# Altium PCB nom.pcbdoc
Units mm, origin at the board's own origin, x right, y up, seen from the top; angles counter-clockwise.
Board outline 123.47 x 110.09 mm, 2 copper layers (Top Layer, Bottom Layer); 65 components, 89 nets, 222 pads, 59 vias.
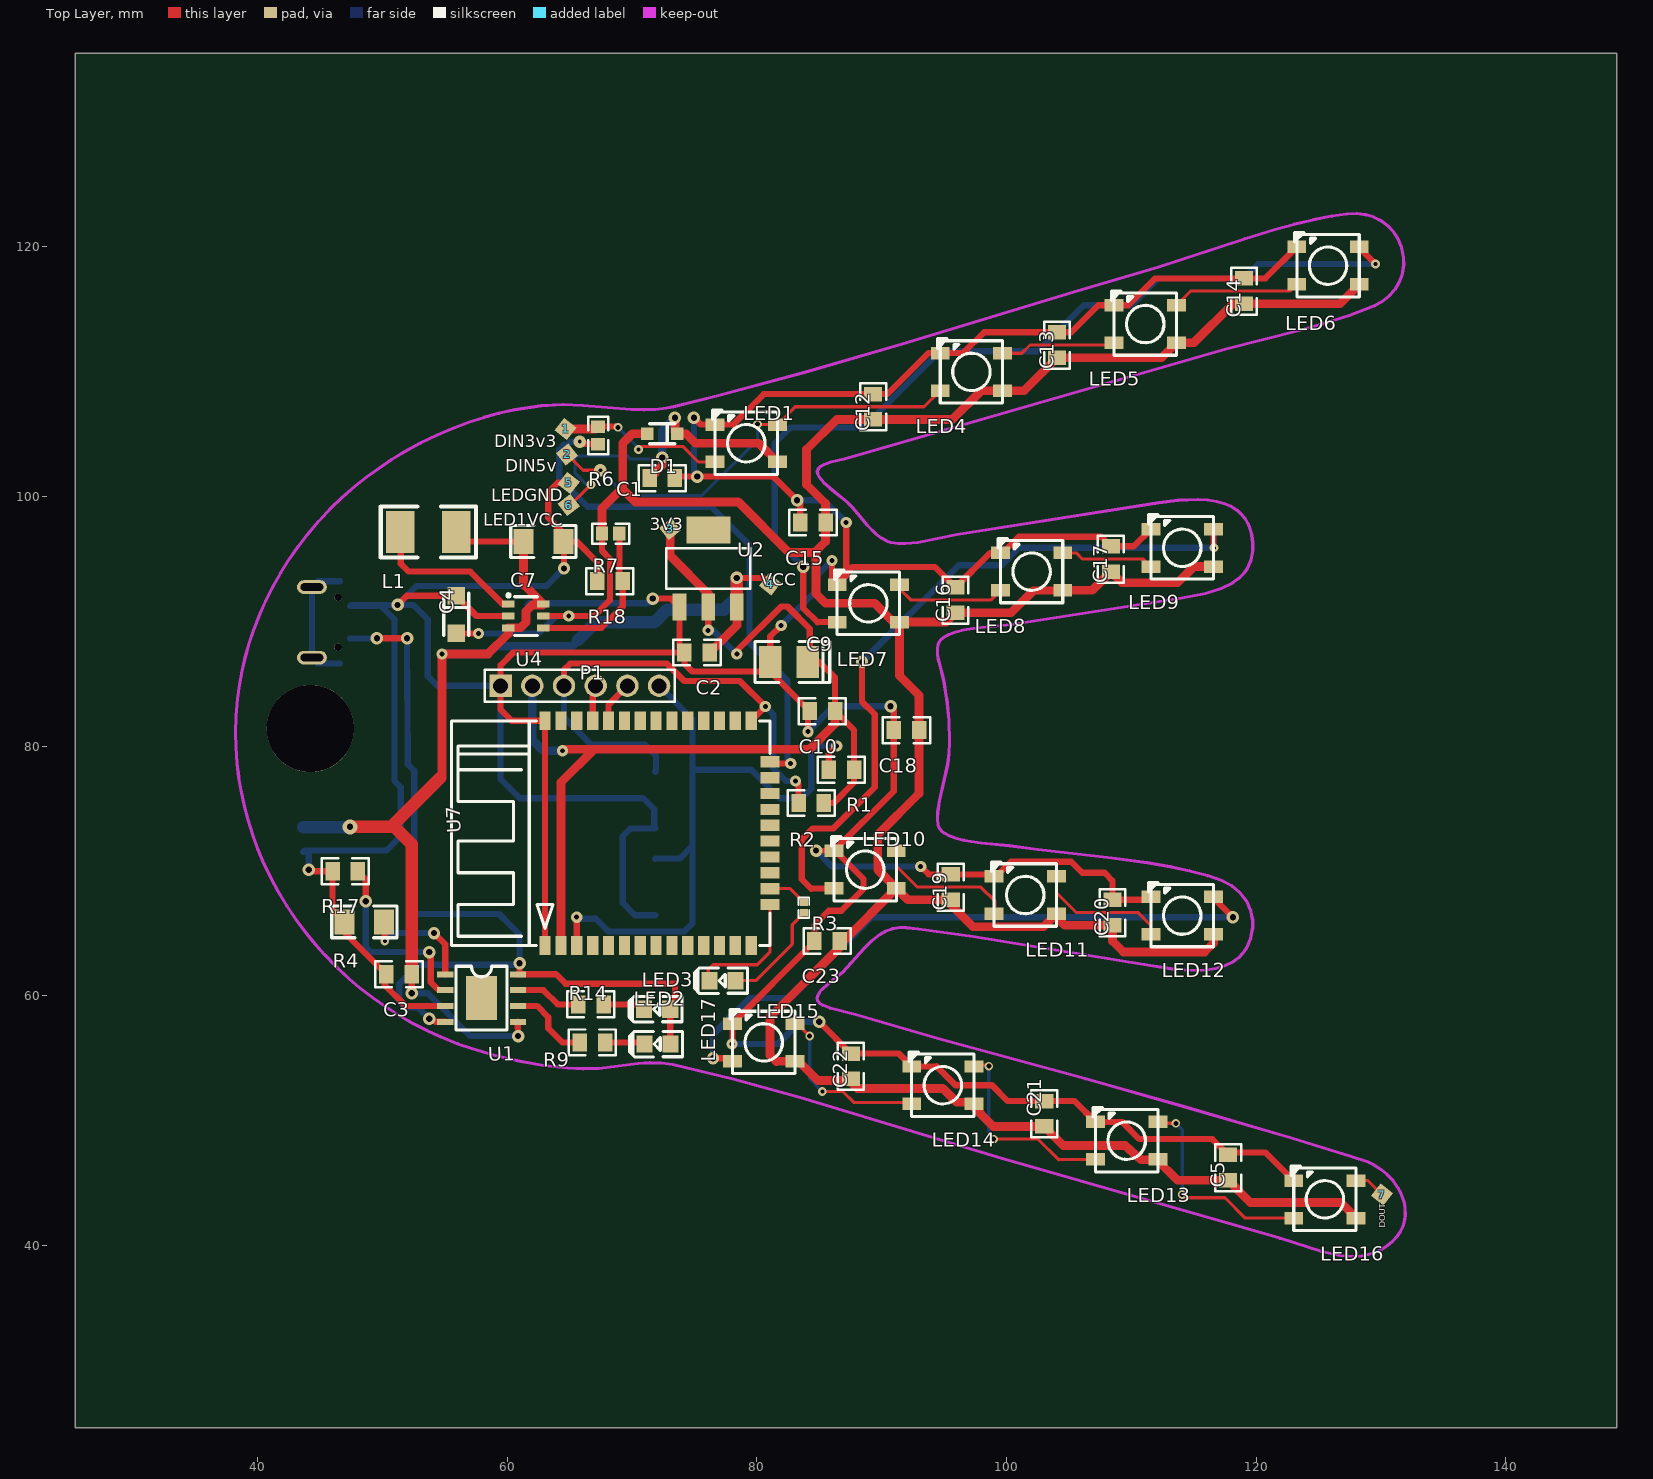
[diagram p0: Top Layer view]
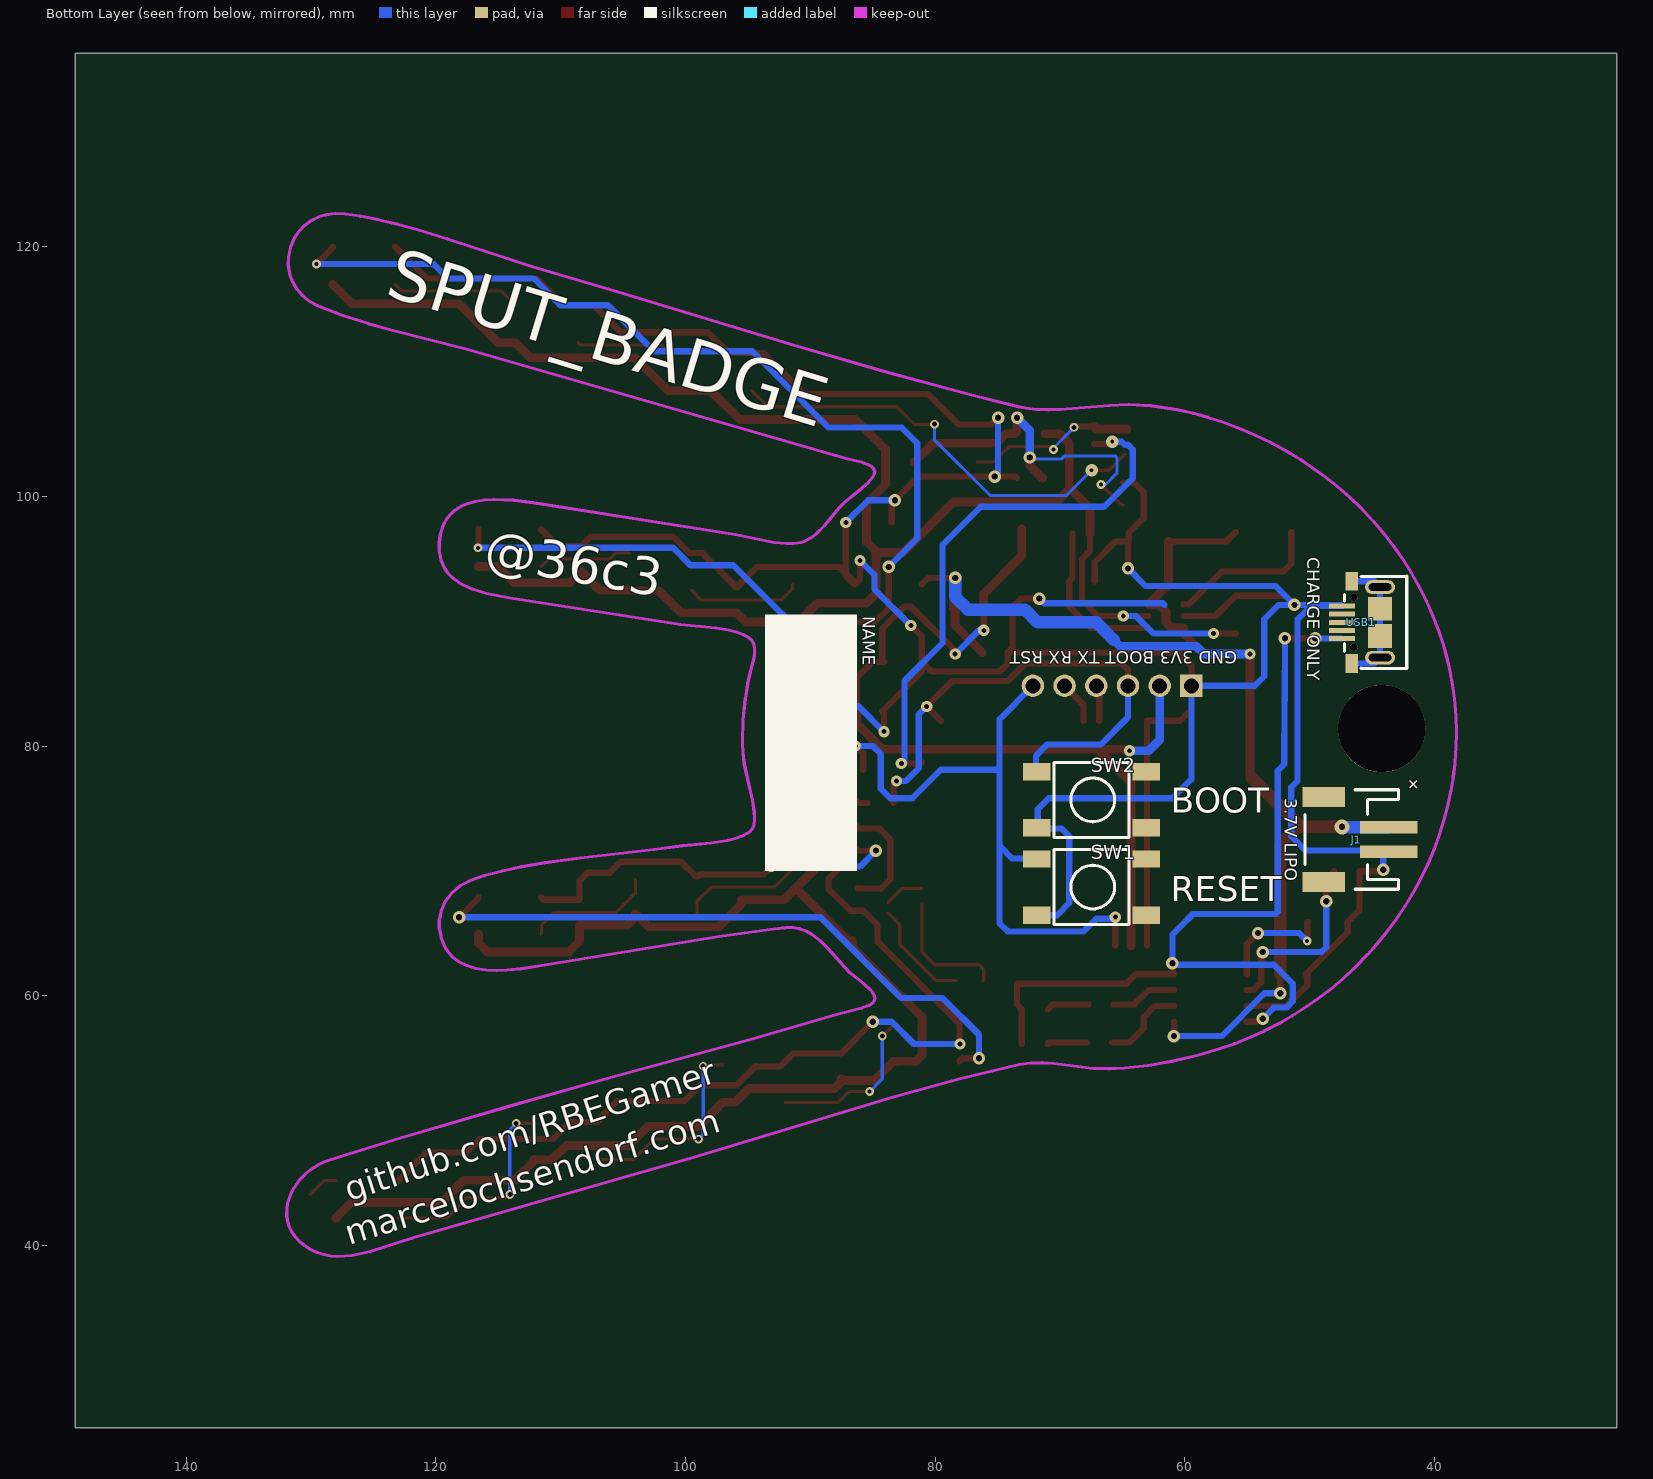
[diagram p1: Bottom Layer view, seen from below]

## Layer stack, top to bottom
Top Layer: signal copper (thickness not stored)
Dielectric: dielectric 0.32, FR-4, Dk 4.8
Bottom Layer: signal copper (thickness not stored)

## Board outline
148.868,25.4 25.4,25.4 25.4,135.486 148.868,135.486

## Components (designator, comment, footprint, x,y, rotation, side; value= is the part's Value field where it differs from the comment)
1 "TESTPAD" TESTPAD#1 64.667,105.401 r0 top
2 "TESTPAD" TESTPAD#2 64.794,103.369 r0 top
3 "TESTPAD" TESTPAD#2 73.049,97.4 r0 top
4 "TESTPAD" TESTPAD#3 81.05,92.955 r0 top
5 "TESTPAD" TESTPAD#3 64.921,101.083 r0 top
6 "TESTPAD" TESTPAD#4 64.921,99.305 r0 top
7 "TESTPAD" TESTPAD#3 130.072,44.06 r0 top
C1 "100nF" 0805 72.414,101.464 r0 top
C2 "100nF" 0805 75.208,87.494 r0 top
C3 "10uF" 0805 51.332,61.713 r0 top
C4 "10uF" CAP-SMD_L3.2-W1.6-R-RD 55.904,90.542 r90 top
C5 "100nF" 0805 117.753,46.219 r90 top
C7 "4.7uF" 1206 62.889,96.384 r180 top
C9 "100uF" CAP-SMD_L3.5-W2.8 82.574,86.732 r180 top
C10 "100nF" 0805 85.241,82.795 r0 top
C12 "100nF" 0805 89.305,107.179 r90 top
C13 "100nF" 0805 104.037,112.132 r90 top
C14 "100nF" 0805 119.023,116.45 r90 top
C15 "100nF" 0805 84.479,97.908 r180 top
C16 "100nF" 0805 95.909,91.685 r90 top
C17 "100nF" 0805 108.355,94.987 r90 top
C18 "100nF" 0805 91.972,81.271 r180 top
C19 "100nF" 0805 95.528,68.698 r90 top
C20 "100nF" 0805 108.482,66.666 r90 top
C21 "100nF" 0805 103.021,50.537 r90 top
C22 "100nF" 0805 87.527,54.347 r90 top
C23 "100nF" 0805 85.622,64.38 r180 top
D1 "1N4148WS T4" SOD-323_L1.8-W1.3-LS2.5-FD 72.414,105.02 r0 top
J1 "JST_2MM_MALE" JST-2-SMD 46.252,72.508 r270 bottom
L1 "4.7uH" 1812 53.669,97.146 r180 top
LED1 "WS2812B-B" LED-5050_4P 79.145,104.258 r0 top
LED2 "whiteLEDSMD" LED-0805 71.999,58.919 r0 top
LED3 "whiteLEDSMD" LED-0805 77.24,61.205 r0 top
LED4 "WS2812B-B" LED-5050_4P 97.179,109.973 r0 top
LED5 "WS2812B-B" LED-5050_4P 111.109,113.807 r0 top
LED6 "WS2812B-B" LED-5050_4P 125.754,118.482 r0 top
LED7 "WS2812B-B" LED-5050_4P 88.924,91.431 r0 top
LED8 "WS2812B-B" LED-5050_4P 102.005,93.971 r0 top
LED9 "WS2812B-B" LED-5050_4P 114.07,95.876 r0 top
LED10 "WS2812B-B" LED-5050_4P 88.67,70.095 r0 top
LED11 "WS2812B-B" LED-5050_4P 101.497,68.063 r0 top
LED12 "WS2812B-B" LED-5050_4P 114.07,66.412 r0 top
LED13 "WS2812B-B" LED-5050_4P 109.625,48.378 r0 top
LED14 "WS2812B-B" LED-5050_4P 94.893,52.823 r0 top
LED15 "WS2812B-B" LED-5050_4P 80.542,56.252 r0 top
LED16 "WS2812B-B" LED-5050_4P 125.5,43.679 r0 top
LED17 "whiteLEDSMD" LED-0805 72.033,56.125 r0 top
P1 "Header-Female-2.54_1x6" HDR-TH_6P-P2.54-V 65.81,84.827 r0 top
R1 "10K" 0805 86.765,78.096 r0 top
R2 "10K" 0805 84.352,75.429 r0 top
R3 "220" 0402 83.76,67.047 r90 top
R4 "0" 1206 48.538,65.904 r0 top
R6 "330" 0603 67.269,104.893 r270 top
R7 "750K" 0603 68.285,97.019 r180 top
R9 "1K" 0805 66.826,56.252 r0 top
R14 "1K" 0805 66.699,59.3 r0 top
R17 "1.2K" 0805 47.014,69.968 r0 top
R18 "220K" 0805 68.223,93.209 r0 top
SW1 "SMD Tactile Switch6*6*6mm" SW-SMD_4PIN-L6.00-W6.00 67.461,68.698 r0 bottom
SW2 "SMD Tactile Switch6*6*6mm" SW-SMD_4PIN-L6.00-W6.00 67.461,75.683 r0 bottom
U1 "TP4056" ESOP-8_L4.9-W3.9-P1.27-LS6.0-BL-EP 57.936,59.808 r270 top
U2 "AMS1117-3.3" SOT-223_L6.5-W3.5-P2.30-LS7.0-BR 76.097,94.225 r270 top
U4 "MCP1640T-I/CHY" SOT-23-6_L2.9-W1.6-P0.95-LS2.8-BL 61.492,90.415 r270 top
U7 "ESP-32S" WIFIM-SMD_ESP-32S 72.033,73.016 r90 top
USB1 "MICRO5.9MMUSB" MICRO-USB-SMD_5PIN-H-FEMALE-PITCH0.65-L_MICRO5.9MMUSB 45.871,89.907 r270 bottom

## Footprints (in the part's own frame and the unit in brackets; to place one, negate y for a bottom-side part, rotate by r counter-clockwise, add the part's x,y. Pads: shape width x height; smd on the part's side, far side on the other; paste and mask are expansions set on the pad)
0402 [mm]
  rect 0.6x0.65 smd: 1(-0.424,0) 2(0.424,0)
  silkscreen extent -0.82,-0.43 0.81,0.43
0603 [mm]
  rect 1x1.1 smd: 1(-0.7,0) 2(0.7,0)
  silkscreen extent -1.5,-0.8 1.5,0.8
0805 [mm]
  rect 1.16x1.45 smd: 1(-1.016,0) 2(1.016,0)
  silkscreen extent -1.9,-1.03 1.87,1.04
1206 [mm]
  rect 1.6x2 smd: 1(-1.6,0) 2(1.6,0)
  silkscreen extent -2.61,-1.27 2.62,1.27
1812 [mil]
  rect 90x133.86 smd: 1(-88,0) 2(88,0)
  silkscreen extent -150,-80 150,80
CAP-SMD_L3.2-W1.6-R-RD [mm]
  rect 1.4x1.4 smd: 1(1.5,0) 2(-1.5,0)
  silkscreen extent -1.7,-1 1.7,1
CAP-SMD_L3.5-W2.8 [mm]
  rect 1.8x2.6 smd: 1(-1.501,0) 2(1.501,0)
  silkscreen extent -3.26,-1.65 2.73,1.65
ESOP-8_L4.9-W3.9-P1.27-LS6.0-BL-EP [mm]
  rect 0.48x1.3 smd: 1(-1.905,-2.908) 2(-0.635,-2.908) 3(0.635,-2.908) 4(1.905,-2.908) 5(1.905,2.908) 6(0.635,2.908) 7(-0.635,2.908) 8(-1.905,2.908)
  rect 3.5x2.5 smd: 9(0,0)
  silkscreen extent -2.55,-2.05 2.55,2.05
HDR-TH_6P-P2.54-V [mm]
  rect 1.8x1.8 hole 1.2: 1(-6.35,0)
  round 1.8 hole 1.2: 2(-3.81,0) 3(-1.27,0) 4(1.27,0) 5(3.81,0) 6(6.35,0)
  silkscreen extent -7.62,-1.27 7.62,1.27
JST-2-SMD [mil]
  rect 39.4x181.1 smd: 1(39,102.5) 2(-39,102.5)
  rect 63x133.9 smd: NC1(134,-102.5) NC2(-134,-102.5)
  silkscreen extent -157,-162 157,134
LED-0805 [mm]
  rect 1.3x1.4 smd: 1(1.05,0) 2(-1.05,0)
  silkscreen extent -2.22,-1.04 1.99,1.01
LED-5050_4P [mm]
  rect 1.5x1 smd: 1(2.5,-1.5) 2(2.5,1.5) 3(-2.5,1.5) 4(-2.5,-1.5)
  silkscreen extent -2.7,-2.5 2.5,2.65
MICRO-USB-SMD_5PIN-H-FEMALE-PITCH0.65-L_MICRO5.9MMUSB [mm]
  rect 0.4x2.1 smd: 1(1.3,-1.525) 2(0.65,-1.525) 3(0,-1.525) 4(-0.65,-1.525) 5(-1.3,-1.525)
  rect 1.5x1 smd: 6(-3.3,-0.725) 6(3.3,-0.725)
  oval 1.1x2.4 hole 0.6 slot 1.8 at 90 deg: 6(-2.825,1.525) 6(2.825,1.525)
  rect 1.9x1.9 smd: 6(-1.1,1.525) 6(1.1,1.525)
  round 0.6 hole 0.6 unplated: ""(-2,-0.575) ""(2,-0.575)
  silkscreen extent -3.7,-1.32 3.7,3.67
SOD-323_L1.8-W1.3-LS2.5-FD [mm]
  rect 1x1 smd: 1(-1.2,0) 2(1.2,0)
  silkscreen extent -1,-0.8 1,0.8
SOT-23-6_L2.9-W1.6-P0.95-LS2.8-BL [mm]
  rect 0.55x1 smd: 1(-0.95,-1.4) 2(0,-1.4) 3(0.95,-1.4) 4(0.95,1.4) 5(0,1.4) 6(-0.95,1.4)
  silkscreen extent -1.78,-1.52 1.55,0.9
SOT-223_L6.5-W3.5-P2.30-LS7.0-BR [mil]
  rect 85x43 smd: 1(122,-90.5) 2(122,0.5) 3(122,90.5)
  rect 85x138 smd: 4(-122,0.5)
  silkscreen extent -64,-132 64,132
SW-SMD_4PIN-L6.00-W6.00 [mm]
  rect 2.2x1.4 smd: 1(4.4,-2.25) 2(-4.4,-2.25) 3(4.4,2.25) 4(-4.4,2.25)
  silkscreen extent -3,-3 3,3
TESTPAD#1 [mm]
  rect 1.268x1.268 smd rot 141.99: TP(0,0)
TESTPAD#2 [mm]
  rect 1.268x1.268 smd rot 38.01: TP(0,0)
TESTPAD#3 [mm]
  rect 1.268x1.268 smd rot 51.99: TP(0,0)
TESTPAD#4 [mm]
  rect 1.268x1.268 smd rot 128.01: TP(0,0)
WIFIM-SMD_ESP-32S [mm]
  rect 1.5x0.9 smd: 1(-9,9.005) 2(-9,7.735) 3(-9,6.465) 4(-9,5.195) 5(-9,3.925) 6(-9,2.655) 7(-9,1.385) 8(-9,0.115) 9(-9,-1.155) 10(-9,-2.425) 11(-9,-3.695) 12(-9,-4.965) 13(-9,-6.235) 14(-9,-7.505) 25(9,-7.505) 26(9,-6.235) 27(9,-4.965) 28(9,-3.695) 29(9,-2.425) 30(9,-1.155) 31(9,0.115) 32(9,1.385) 33(9,2.655) 34(9,3.925) 35(9,5.195) 36(9,6.465) 37(9,7.735) 38(9,9.005)
  rect 0.9x1.5 smd: 15(-5.715,-9.005) 16(-4.445,-9.005) 17(-3.175,-9.005) 18(-1.905,-9.005) 19(-0.635,-9.005) 20(0.635,-9.005) 21(1.905,-9.005) 22(3.175,-9.005) 23(4.445,-9.005) 24(5.715,-9.005)
  silkscreen extent -9,-9 9,16.5

## Free pads (board coordinates)
  round 7 hole 7 unplated: ""(44.22,81.398)

## Via types
v1: diameter 1, hole 0.5, Top Layer to Bottom Layer, 26 vias
v2: diameter 0.9, hole 0.4, Top Layer to Bottom Layer, 17 vias
v3: diameter 0.7, hole 0.4, Top Layer to Bottom Layer, 7 vias
v4: diameter 0.7, hole 0.305, Top Layer to Bottom Layer, 5 vias
v5: diameter 1, hole 0.305, Top Layer to Bottom Layer, 2 vias
v6: diameter 0.71, hole 0.305, Top Layer to Bottom Layer, 1 vias
v7: diameter 1.2, hole 0.5, Top Layer to Bottom Layer, 1 vias

## Nets (pads, with @x,y where several pads share a name; then routed paths per layer and width w, separated by ;. In a path a pad name is that pad's centre, name@x,y a point inside that pad or via, vN(x,y) a via of type N, cw(c..) or ccw(c..) an arc to the next point about the centre after c; other vN are vias at no path point)
+5V: C4.2 C5.1 C12.1 C13.1 C14.1 C15.1 C16.1 C17.1 C18.1 C19.1 C20.1 C21.1 C22.1 C23.1 D1.1 LED4.1 LED5.1 LED6.1 LED7.1 LED8.1 LED9.1 LED10.1 LED11.1 LED12.1 LED13.1 LED14.1 LED15.1 LED16.1 R7.2 U4.5 | length 273.1
  Top Layer w0.5: C4.2@55.904,89.041 v2(57.682,89.018) ; U4.5 66.953,90.415 68.223,91.685 68.223,94.987 67.588,95.622 R7.2@67.586,97.019 ; U4.5 v2(64.921,90.415)
  Top Layer w0.7: R7.2@67.586,97.019 67.588,99.051 69.112,100.575 69.239,100.575 ; D1.1 70.001,105.02 69.239,104.258 69.239,100.575 ; LED15.1@83.018,54.728 83.336,54.728 84.86,53.204 C22.1@87.4,53.204 ; LED15.1@83.042,54.751 81.558,54.728 81.05,55.236 81.05,58.284 86.638,63.872 C23.1 86.955,64.38 LED10.1 ; 84.733,95.495 84.733,92.193 85.495,91.431 89.432,91.431 90.932,89.931 LED7.1 ; C22.1 C22.1@87.4,53.204 ; LED11.1@103.997,66.309 104.657,65.65 C20.1 108.482,64.38 109.371,63.491 115.848,63.491 116.57,64.213 LED12.1 ; LED11.1 102.957,65.523 97.306,65.523 95.528,67.301 C19.1 92.084,67.682 LED10.1 ; LED8.1@104.505,92.47 102.132,92.447 100.354,90.669 C16.1 95.171,89.931 LED7.1 ; LED8.1 106.855,92.471 C17.1 109.244,93.082 113.689,93.082 114.985,94.375 LED9.1@116.57,94.375 ; LED13.1@112.014,46.878 113.689,45.203 C5.1 119.531,43.425 126.77,43.425 LED16.1@128,42.178 ; LED13.1@112.125,46.877 110.768,46.854 109.498,47.997 104.545,47.997 C21.1 98.941,49.521 97.012,51.45 96.012,51.45 94.893,52.569 88.035,52.569 C22.1@87.4,53.204 ; LED5.1 112.418,111.116 C13.1 101.394,108.473 LED4.1 97.965,108.473 95.655,106.163 C12.1 86.384,106.163 83.971,103.75 83.971,100.956 85.495,99.432 C15.1 85.495,96.384 84.606,95.495 82.574,95.495 78.51,99.559 70.255,99.559 69.239,100.575 ; LED5.1@113.611,112.307 115.008,112.307 118.134,115.434 C14.1 126.706,115.434 LED6.1 ; LED10.1 89.686,70.079 89.686,72.889 92.988,76.191 C18.1 92.988,84.065 91.424,85.629 LED7.1
  Bottom Layer w0.5: v2(57.682,89.018) 62.508,89.018 63.905,90.415 v2(64.921,90.415)
C10_2: 3.TP C9.1 C10.2 P1.2 R1.2 R2.2 U2.2 U7.2 | length 86
  Top Layer w0.5: v2(76.097,89.272) 76.097,91.113 U2.2 ; v2(78.383,87.367) 78.383,87.621 81.939,91.177 82.447,91.177 84.225,89.399 84.225,86.882 C9.1 84.987,86.732 86.257,85.462 C10.2 87.781,81.271 R1.2 87.781,77.08 86.13,75.429 R2.2
  Top Layer w0.7: U7.2@64.299,64.017 64.299,77.093 66.953,79.747 ; v2(64.413,79.62) 64.54,79.747 66.953,79.747 ; 3.TP 73.049,95.241 76.11,92.18 U2.2 ; C10.2 86.257,81.779 84.225,79.747 66.953,79.747
  Bottom Layer w0.5: v2(76.097,89.272) 76.478,89.272 v2(78.383,87.367)
  Bottom Layer w0.7: P1.2 62,80.509 62.889,79.62 v2(64.413,79.62)
GND: 5.TP C1.2 C2.1 C3.1 C4.1 C5.2 C7.1 C9.2 C10.1 C12.2 C13.2 C14.2 C15.2 C16.2 C17.2 C18.2 C19.2 C20.2 C21.2 C22.2 C23.2 J1.1 LED1.3 LED4.3 LED5.3 LED6.3 LED7.3 LED8.3 LED9.3 LED10.3 LED11.3 LED12.3 LED13.3 LED14.3 LED15.3 LED16.3 P1.1 R4.1 R17.1 R18.1 SW1.3 SW2.3 U1.3 U2.1 U4.2 U7.1 U7.38 USB1.5 | length 460.3
  Top Layer w0.5: v1(44.093,70.095) 44.22,69.968 R17.1 45.998,66.844 R4.1 46.938,65.091 C3.1 50.189,61.586 50.189,60.824 51.84,59.173 U1.3 ; v1(51.205,91.304) 51.943,92.042 C4.1 57.531,90.415 U4.2 ; U7.1 U7.38 60.349,82.033 59.46,82.922 P1.1 59.46,86.478 60.476,87.494 C2.1 ; v1(64.54,94.225) 64.54,96.333 C7.1 ; 5.TP 64.032,101.083 63.27,100.321 63.27,98.289 64.489,97.07 C7.1 ; R18.1 67.207,94.733 65.556,96.384 C7.1 ; v1(71.652,91.812) 73.113,91.812 U2.1 73.799,87.888 C2.1 ; C1.2 73.557,101.591 v1(75.208,101.591) 81.304,101.591 v1(83.209,99.686) 83.463,99.432 C15.2 ; v1(74.954,106.29) 75.486,105.758 LED1.3 78.105,105.758 80.542,108.195 C12.2 90.448,108.195 93.75,111.497 94.68,111.474 96.544,111.497 98.195,113.148 C13.2 105.18,113.148 107.339,115.307 LED5.3 109.752,115.307 111.911,117.466 C14.2 120.739,117.466 LED6.3 ; v2(78.002,56.125) 78.042,56.165 LED15.3 84.606,64.316 C23.2 84.606,65.65 85.749,66.793 86.765,66.793 88.543,68.571 88.543,69.333 86.281,71.595 LED10.3 90.956,76.381 C18.2 90.956,82.922 v1(90.702,83.176) ; v2(81.939,89.653) 81.073,88.787 C9.2 ; v2(84.098,81.144) 84.098,82.668 C10.1 81.073,85.947 C9.2 ; v1(84.733,71.619) LED10.3@86.171,71.596 ; v1(84.987,57.903) C22.2 91.353,55.363 LED14.3 ; v2(86.003,94.86) 86.003,93.352 LED7.3 ; v2(87.146,97.908) 87.146,93.653 LED7.3 ; LED14.3@92.394,54.324 94.385,54.347 95.909,52.823 98.83,52.823 100.1,51.553 C21.2 105.45,51.553 LED13.3 109.268,49.878 110.641,48.505 116.483,48.505 C5.2 ; v2(93.115,70.349) 93.75,69.714 C19.2 98.846,69.714 LED11.3 ; LED11.3@98.998,69.564 99.186,69.564 100.354,70.73 105.18,70.73 106.069,69.841 107.847,69.841 108.482,69.206 C20.2 111.341,67.682 LED12.3 ; LED9.3 110.198,96.003 C17.2 107.593,96.765 100.989,96.765 99.695,95.471 LED8.3 98.679,95.471 C16.2 94.258,94.352 87.654,94.352 86.424,93.122 LED7.3 ; C5.2@117.546,47.442 120.737,47.442 LED16.3 ; C2.1 74.192,86.605 74.827,85.97 80.311,85.97 C9.2
  Bottom Layer w0.5: J1.1 J1.1@43.75,71.619 ; v1(44.093,70.095) 44.093,71.276 J1.1@43.75,71.619 ; 61.619,91.304 61.746,91.431 70.636,91.431 71.271,91.431 v1(71.652,91.812) ; v1(64.54,94.225) 63.143,92.828 52.729,92.828 v1(51.205,91.304) ; SW1.3 70.219,66.448 69.239,67.428 69.239,72.762 69.874,73.397 71.825,73.397 SW2.3 71.779,73.515 71.779,74.921 70.89,75.81 60.984,75.81 59.46,77.334 P1.1 54.38,84.827 53.618,85.589 53.618,90.161 52.475,91.304 v1(51.205,91.304) ; v1(74.954,106.29) 74.954,101.845 v1(75.208,101.591) ; v2(78.002,56.125) 81.685,56.125 83.463,57.903 v1(84.987,57.903) ; v2(81.939,89.653) 84.86,92.574 84.86,92.701 84.86,93.717 v2(86.003,94.86) ; v1(83.209,99.686) 85.368,99.686 v2(87.146,97.908) ; v2(84.098,81.144) 86.13,83.176 v1(90.702,83.176) ; v1(84.733,71.619) 86.003,70.349 v2(93.115,70.349) ; J1.1@43.75,71.619 50.316,71.619 51.459,72.762 51.459,76.699 50.951,77.207 50.951,90.161 49.905,91.207 USB1.5 47.493,91.304 v1(51.205,91.304)
J1_NC1: J1.NC1
J1_NC2: J1.NC2
LED1_1: 6.TP C1.1 D1.2 LED1.1 | length 28.5
  Top Layer w0.254: 6.TP 65.048,99.305 66.191,100.448 v4(66.699,100.956)
  Top Layer w0.7: C1.1 72.414,102.48 v1(72.414,103.115) ; v1(73.43,106.29) 73.43,105.204 D1.2 74.319,105.02 75.081,104.258 80.145,104.258 LED1.1
  Bottom Layer w0.254: v4(66.699,100.956) 66.318,100.956 65.429,101.845 65.429,103.115 65.556,103.242 69.62,103.242 69.874,102.988 72.287,102.988 v1(72.414,103.115)
  Bottom Layer w0.7: v1(72.414,103.115) 72.414,105.274 v1(73.43,106.29)
LED1_2: 2.TP LED1.2 LED4.4 | length 35.5
  Top Layer w0.254: 2.TP 66.064,102.099 v5(67.461,102.099) ; v3(80.034,105.782) 80.058,105.758 LED1.2 83.066,107.179 93.385,107.179 LED4.4
  Bottom Layer w0.254: v5(67.461,102.099) 69.493,100.067 75.589,100.067 80.034,104.512 v3(80.034,105.782)
LED1_4: 1.TP LED1.4 R6.1 | length 13.5
  Top Layer w0.254: v4(70.509,103.75) 70.763,104.004 74.065,104.004 75.311,102.758 LED1.4
  Top Layer w0.5: R6.1 68.793,105.593 v3(68.858,105.528)
  Top Layer w0.7: 1.TP 67.077,105.401 R6.1
  Bottom Layer w0.254: v3(68.858,105.528) 70.509,103.877 v4(70.509,103.75)
LED3_1: LED3.1 R3.1 | length 8.6
  Top Layer w0.254: LED3.1 79.907,61.205 82.828,64.126 82.828,65.69 R3.1
LED4_2: LED4.2 LED5.4 | length 9.3
  Top Layer w0.254: LED4.2 101.219,111.473 101.878,112.132 108.434,112.132 LED5.4
LED5_2: LED5.2 LED6.4 | length 10.3
  Top Layer w0.254: LED5.2 114.752,116.45 122.722,116.45 LED6.4
LED6_2: LED6.2 LED7.4 | length 73.3
  Top Layer w0.5: v1(83.717,94.352) 83.717,91.05 84.86,89.907 LED7.4@86.425,89.93 ; LED6.2 128.254,119.919 v6(129.564,118.609)
  Bottom Layer w0.5: v1(83.717,94.352) 81.431,96.638 81.431,104.258 82.701,105.528 88.543,105.528 94.639,111.624 102.513,111.624 104.037,113.148 106.196,115.307 110.006,115.307 112.165,117.466 119.023,117.466 120.166,118.609 v6(129.564,118.609)
LED7_2: LED7.2 LED8.4 | length 9.1
  Top Layer w0.254: LED7.2 91.424,92.614 92.353,91.685 98.719,91.685 LED8.4@99.506,92.47
LED8_2: LED8.2 LED9.4 | length 7.5
  Top Layer w0.254: LED8.2 105.585,95.471 106.069,94.987 110.96,94.987 LED9.4
LED9_2: LED9.2 LED10.4 | length 57.6
  Top Layer w0.5: LED10.4 84.352,68.571 83.59,69.333 83.59,72.508 84.479,73.397 86.13,73.397 89.432,76.699 89.432,82.541 88.416,83.557 88.416,86.097 v1(88.416,86.732) ; LED9.2 116.57,95.916 v4(116.61,95.876)
  Bottom Layer w0.5: v1(88.416,86.732) 96.163,94.479 99.592,94.479 100.989,95.876 v4(116.61,95.876)
LED10_2: LED10.2 LED11.4 | length 11.3
  Top Layer w0.254: LED10.2 91.17,70.389 92.861,68.698 97.941,68.698 99.084,67.555 99.084,66.65 LED11.4
LED11_2: LED11.2 LED12.4 | length 10.4
  Top Layer w0.254: LED11.2@103.997,69.309 103.997,68.23 105.561,66.666 110.514,66.666 111.53,65.65 111.53,64.952 LED12.4
LED12_2: LED12.2 LED15.4 | length 51.4
  Top Layer w0.5: v1(76.478,54.982) 77.813,54.982 LED15.4 ; LED12.2 116.57,67.849 v1(118.134,66.285)
  Bottom Layer w0.5: v1(76.478,54.982) 76.478,56.887 79.399,59.808 82.701,59.808 89.178,66.285 v1(118.134,66.285)
LED13_2: LED13.2 LED16.4 | length 17.1
  Top Layer w0.254: LED13.2 112.228,49.775 v3(113.562,49.775) ; v3(114.07,44.06) 114.324,43.806 117.499,43.806 119.126,42.179 LED16.4
  Bottom Layer w0.254: v3(113.562,49.775) 114.07,49.267 v3(114.07,44.06)
LED13_4: LED13.4 LED14.2 | length 16.5
  Top Layer w0.254: LED14.2@97.012,54.45 98.473,54.45 v3(98.576,54.347) ; v3(98.957,48.505) 102.513,48.505 104.164,46.854 LED13.4@107.126,46.877
  Bottom Layer w0.254: v3(98.576,54.347) 98.576,48.886 v3(98.957,48.505)
LED14_4: LED14.4 LED15.2 | length 13.6
  Top Layer w0.254: LED15.2 83.233,57.752 v3(84.225,56.76) ; v4(85.241,52.315) 86.892,52.315 87.781,51.426 LED14.4@92.013,51.449
  Bottom Layer w0.254: v3(84.225,56.76) 84.225,53.331 v4(85.241,52.315)
LED16_2: 7.TP LED16.2 | length 2.5
  Top Layer w0.254: LED16.2 128.953,45.179 7.TP
R6_2: R6.2 U7.24 | length 43.4
  Top Layer w0.5: v5(65.81,104.385) 66.002,104.193 R6.2 ; U7.24 81.165,78.604 v2(82.701,78.604)
  Bottom Layer w0.5: 64.54,104.131 64.159,103.75 64.159,101.464 66.445,99.178 76.351,99.178 79.399,96.13 79.399,88.256 82.447,85.208 v2@82.447,78.604 ; 64.794,104.131 65.048,104.385 v5(65.81,104.385)
R9_2: LED17.2 R9.2 | length 3.2
  Top Layer w0.5: R9.2 70.856,56.252 LED17.2
R14_2: LED2.2 R14.2 | length 3.4
  Top Layer w0.5: R14.2 70.568,59.3 LED2.2
S$18: 
S$20: 
S$28: 
S$38: 
S$40: 
S$67: 
S$69: 
S$214: 
S$224: 
S$228: 
S$230: 
S$232: 
SW1_2: SW1.2
SW1_4: SW1.4
SW2_2: SW2.2
SW2_4: SW2.4
U1_1: R4.2 U1.1 | length 9.4
  Top Layer w0.5: R4.2 50.189,65.853 v4(50.189,64.38) ; v1(54.126,65.015) 55.028,64.113 U1.1
  Bottom Layer w0.5: v4(50.189,64.38) 50.824,65.015 v1(54.126,65.015)
U1_2: R17.2 U1.2 | length 15.5
  Top Layer w0.5: R17.2 48.665,69.333 v1(48.665,67.555) ; v1(53.745,63.491) 53.872,63.364 53.872,61.078 54.507,60.443 U1.2
  Bottom Layer w0.5: v1(48.665,67.555) 48.665,63.872 49.046,63.491 v1(53.745,63.491)
U1_4: LED2.1 LED17.1 U1.4 U1.8 USB1.1 | length 73.1
  Top Layer w0.5: v1(49.554,88.637) v1(51.967,88.637) ; v1(53.745,58.157) 54.253,57.903 U1.4@55.041,57.903 ; v1(60.984,62.602) 60.984,61.853 U1.8 63.905,61.713 64.667,60.951 73.43,60.951 73.43,59.3 LED2.1 73.049,56.159 LED17.1
  Bottom Layer w0.5: USB1.1 49.524,88.607 v1(49.554,88.637) ; v1(51.967,88.637) 52.031,78.54 52.539,78.032 52.539,66.729 52.729,66.539 59.333,66.539 60.286,65.586 60.984,64.888 v1(60.984,62.602) 60.857,62.475 52.856,62.475 51.332,60.951 51.332,59.554 51.84,59.046 52.856,59.046 v1(53.745,58.157)
U1_6: R9.1 U1.6 | length 6.7
  Top Layer w0.5: U1.6 62.381,59.173 63.27,58.284 63.27,57.395 64.413,56.252 R9.1
U1_7: R14.1 U1.7 | length 5.3
  Top Layer w0.5: U1.7 62.889,60.443 64.032,59.3 R14.1
U1_9: U1.9
U2_4: U2.4
U4_1: L1.2 U4.1 | length 12.5
  Top Layer w0.5: L1.2 51.459,97.12 51.459,94.606 52.094,93.971 57.047,93.971 59.653,91.365 U4.1
U4_4: R7.1 R18.2 U4.4 | length 13
  Top Layer w0.5: U4.4 67.527,89.465 69.239,91.177 R18.2 68.985,93.463 R7.1
U7_3: P1.6 R1.1 SW1.1 U7.3 | length 53.9
  Top Layer w0.5: v2(65.556,66.285) U7.3@65.569,64.017 ; R1.1 85.749,79.366 v2(86.384,80.001)
  Bottom Layer w0.5: v2(65.556,66.285) 65.683,66.158 67.08,66.158 68.096,65.142 74.192,65.142 74.827,65.777 74.827,72 ; SW1.1 71.897,70.984 73.811,70.984 74.827,72 ; P1.6 74.827,82.16 74.827,78.096 ; v2(86.384,80.001) 84.987,80.001 84.352,79.366 84.352,76.572 83.59,75.81 81.812,75.81 79.526,78.096 74.827,78.096 ; 74.827,72 74.827,78.096
U7_4: U7.4
U7_5: U7.5
U7_6: U7.6
U7_7: U7.7
U7_8: U7.8
U7_9: U7.9
U7_10: U7.10
U7_11: U7.11
U7_12: U7.12
U7_13: U7.13
U7_14: U7.14
U7_15: LED3.2 U7.15 | length 10.3
  Top Layer w0.254: LED3.2 76.097,61.298 76.097,62.094 76.478,62.475 80.034,62.475 81.038,63.479 U7.15
U7_16: R3.2 U7.16 | length 3.2
  Top Layer w0.254: U7.16 82.661,68.571 R3.2
U7_17: U7.17
U7_18: U7.18
U7_19: U7.19
U7_20: U7.20
U7_21: U7.21
U7_22: U7.22
U7_23: U7.23
U7_25: P1.3 R2.1 SW2.1 U7.25 | length 42.4
  Top Layer w0.5: P1.3 64.54,86.097 65.048,86.605 72.795,86.605 74.192,85.208 78.129,85.208 78.637,85.208 v2(80.669,83.176) 80.669,83.147 U7.25 ; v2(83.082,77.207) 83.336,76.953 R2.1
  Bottom Layer w0.5: P1.3 64.54,82.287 66.699,80.128 71.017,80.128 71.906,79.239 71.906,77.978 SW2.1 ; v2(80.669,83.176) 81.304,82.541 81.304,78.223 82.32,77.207 v2(83.082,77.207)
U7_26: U7.26
U7_27: U7.27
U7_28: U7.28
U7_29: U7.29
U7_30: U7.30
U7_31: U7.31
U7_32: U7.32
U7_33: U7.33
U7_34: P1.5 U7.34 | length 3.4
  Top Layer w0.5: U7.34 68.108,83.315 P1.5
U7_35: P1.4 U7.35 | length 2.9
  Top Layer w0.5: U7.35 66.838,84.585 P1.4
U7_36: U7.36
U7_37: U7.37
USB1_2: USB1.2
USB1_3: USB1.3
USB1_4: USB1.4
USB1_6: USB1.6 | length 10.5
  Bottom Layer w0.5: USB1.6@46.596,86.607 44.821,86.607 44.346,87.082 44.346,88.807 44.346,91.007 44.346,92.732 44.821,93.207 USB1.6@46.596,93.207
VCC: 4.TP C2.2 C3.2 C7.2 J1.2 L1.1 U1.5 U2.3 U4.3 U4.6 | length 109.8
  Top Layer w0.5: v1(52.348,60.189) C3.2 ; L1.1 56.666,96.384 C7.2 ; U1.5 v1(60.857,56.76) ; v1(78.383,93.463) 80.542,93.463 4.TP
  Top Layer w0.7: 54.761,77.461 v2(54.761,87.367) 58.444,87.367 60.092,89.015 U4.3 61.05,89.465 61.492,89.907 61.492,90.796 62,91.304 62.831,91.304 U4.6 61.289,92.968 C7.2 ; C2.2 78.396,89.666 U2.3
  Top Layer w1: C3.2 52.348,72.127 50.951,73.524 v7(47.395,73.524) 50.697,73.524 54.634,77.461 ; v1(78.383,93.463) U2.3
  Bottom Layer w0.5: v1(52.348,60.189) 53.618,60.189 57.047,56.76 v1(60.857,56.76)
  Bottom Layer w0.7: v2(54.761,87.367) 56.031,87.367 58.444,87.367 59.079,88.002 65.175,88.002 65.683,88.51
  Bottom Layer w1: J1.2 47.37,73.498 v7(47.395,73.524) ; 65.683,88.51 67.08,89.907 71.779,89.907 72.795,90.923 77.367,90.923 78.383,91.939 v1(78.383,93.463)
pads on no net: USB1.

## Silkscreen, mask and mechanical layers (free items; w line width, h text height)
Bottom Overlay:
  rectangle: 86.257,69.968 93.623,90.542
  text "SPUT_BADGE" at 124.177,116.172 h4 r17
  text "CHARGE ONLY" at 50.181,95.114 h1 r90
  text "@36c3" at 116.236,94.399 h3 r10
  text "NAME" at 85.779,90.415 h1 r90
  text "GND 3V3 BOOT TX RX RST" at 55.777,87.585 h1 r180
  text "+" at 40.974,76.798 h1 r225
  text "3.7V LIPO" at 51.997,75.81 h1 r90
  text "BOOT" at 61.111,74.667 h2.03
  text "RESET" at 61.111,67.555 h2.03
  text "github.com/RBEGamer" at 126.941,43.483 h2 r342
  text "marcelochsendorf.com" at 126.914,40.013 h2 r343

## Text inside footprints (layer, text, board x,y; h text height)
1: Top Overlay "DIN3v3" at 58.952,103.923 h1
2: Top Overlay "DIN5v" at 59.841,101.98 h1
3: Top Overlay "3V3" at 71.398,97.281 h1
4: Top Overlay "VCC" at 80.288,92.836 h1
5: Top Overlay "LEDGND" at 58.698,99.605 h1
6: Top Overlay "LED1VCC" at 58.063,97.662 h1
7: Top Overlay "DOUT" at 130.322,41.393 h0.5 r90
J1: Document "+" at 43.182,74.936 h0.76 r135; Document "-" at 42.912,69.968 h0.76 r180